# Altium PCB StLink.PcbDoc (part 2 of 3)
Units mm, origin at the board's own origin, x right, y up, seen from the top; angles counter-clockwise.
Board outline 13.1 x 14.6 mm, 6 copper layers (Top Layer, GND, VCC, S3, S4, Bottom Layer), stack 1.623 mm thick; 39 components, 26 nets, 150 pads, 52 vias.
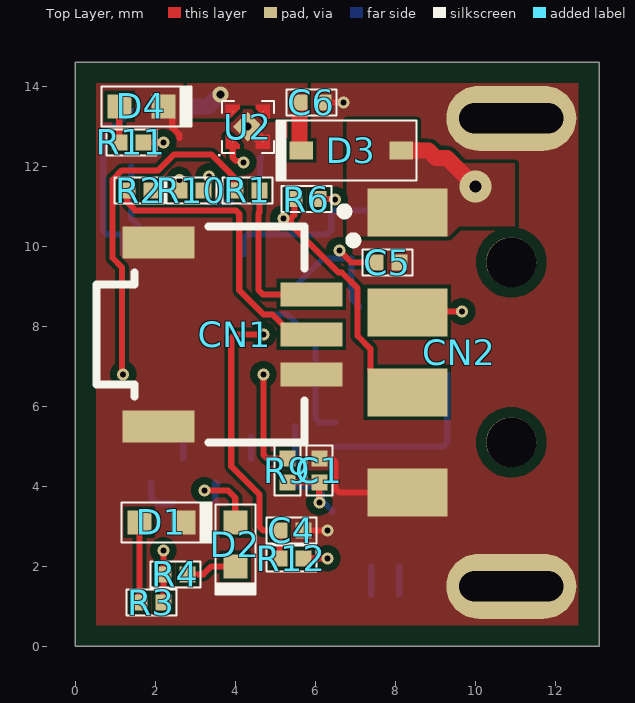
[diagram p0: Top Layer view]

## Part data (continued)
R3 R4 R10 R11: library part RC0201JR-0782RL, "Res Thick Film 0201 82 Ohm 5% 0.05W(1/20W) ±200ppm/C Pad SMD T/R", Case Code (Imperial)=0201, Case Code (Metric)=0603, Manufacturer="Yageo Group", Max Operating Temperature=125°C, Max Power Dissipation=50mW, Min Operating Temperature=-55°C, Supplier Part Number=YAG2365CT-ND, Temperature Coefficient=200ppm/°C, Tolerance=5%, Voltage Rating=25V, Case/Package=0201, Category="Chip SMD Resistors", China RoHS=Non-Compliant, ComponentLink1Description=https://datasheet.octopart.com:443/RC0201JR-0782RL-Yageo-datasheet-175887523.pdf?src-supplier=IHS, ComponentLink1URL=https://datasheet.octopart.com:443/RC0201JR-0782RL-Yageo-datasheet-175887523.pdf?src-supplier=IHS, ComponentLink2Description=https://datasheet.octopart.com:443/RC0201JR-0782RL-Yageo-Group-datasheet-176638170.pdf?src-supplier=Future+Electronics, ComponentLink2URL=https://datasheet.octopart.com:443/RC0201JR-0782RL-Yageo-Group-datasheet-176638170.pdf?src-supplier=Future+Electronics, ComponentLink3Description=https://datasheet.octopart.com:443/RC0201JR-0782RL-Yageo-datasheet-164759695.pdf?src-supplier=Future+Electronics, ComponentLink3URL=https://datasheet.octopart.com:443/RC0201JR-0782RL-Yageo-datasheet-164759695.pdf?src-supplier=Future+Electronics, ComponentLink4Description=https://datasheet.octopart.com:443/RC0201JR-0782RL-Yageo-datasheet-127823281.pdf?src-supplier=Future+Electronics, ComponentLink4URL=https://datasheet.octopart.com:443/RC0201JR-0782RL-Yageo-datasheet-127823281.pdf?src-supplier=Future+Electronics, ComponentLink5Description=https://datasheet.octopart.com:443/RC0201JR-0782RL-Yageo-datasheet-137700087.pdf?src-supplier=Future+Electronics, ComponentLink5URL=https://datasheet.octopart.com:443/RC0201JR-0782RL-Yageo-datasheet-137700087.pdf?src-supplier=Future+Electronics, ComponentLink6Description=https://datasheet.octopart.com:443/RC0201JR-0782RL-Yageo-datasheet-103092701.pdf?src-supplier=Future+Electronics, ComponentLink6URL=https://datasheet.octopart.com:443/RC0201JR-0782RL-Yageo-datasheet-103092701.pdf?src-supplier=Future+Electronics, ComponentLink7Description=https://datasheet.octopart.com:443/RC0201JR-0782RL-Yageo-datasheet-98239111.pdf?src-supplier=Future+Electronics, ComponentLink7URL=https://datasheet.octopart.com:443/RC0201JR-0782RL-Yageo-datasheet-98239111.pdf?src-supplier=Future+Electronics, ComponentLink8Description=https://datasheet.octopart.com:443/RC0201JR-0782RL-Yageo-datasheet-37140709.pdf?src-supplier=Future+Electronics, ComponentLink8URL=https://datasheet.octopart.com:443/RC0201JR-0782RL-Yageo-datasheet-37140709.pdf?src-supplier=Future+Electronics, ComponentLink9Description=https://datasheet.octopart.com:443/RC0201JR-0782RL-Yageo-datasheet-12590898.pdf?src-supplier=Future+Electronics, ComponentLink9URL=https://datasheet.octopart.com:443/RC0201JR-0782RL-Yageo-datasheet-12590898.pdf?src-supplier=Future+Electronics, ComponentLink10Description=https://datasheet.octopart.com:443/RC0201JR-0782RL-Yageo-datasheet-12509713.pdf?src-supplier=Future+Electronics, ComponentLink10URL=https://datasheet.octopart.com:443/RC0201JR-0782RL-Yageo-datasheet-12509713.pdf?src-supplier=Future+Electronics, ComponentLink11Description=https://datasheet.octopart.com:443/RC0201JR-0782RL-Yageo-datasheet-8325180.pdf?src-supplier=Future+Electronics, ComponentLink11URL=https://datasheet.octopart.com:443/RC0201JR-0782RL-Yageo-datasheet-8325180.pdf?src-supplier=Future+Electronics, ComponentLink12Description=https://datasheet.octopart.com:443/RC0201JR-0782RL-Yageo-datasheet-12535854.pdf?src-supplier=Future+Electronics, ComponentLink12URL=https://datasheet.octopart.com:443/RC0201JR-0782RL-Yageo-datasheet-12535854.pdf?src-supplier=Future+Electronics, ComponentLink13Description=https://datasheet.octopart.com/RC0201JR-0782RL-Yageo-datasheet-73766026.pdf, ComponentLink13URL=https://datasheet.octopart.com/RC0201JR-0782RL-Yageo-datasheet-73766026.pdf, ComponentLink14Description=http://sigma.octopart.com:80/conflict_mineral_statement/Yageo-company-3.pdf?src-supplier=Compliance+Statements, ComponentLink14URL=http://sigma.octopart.com:80/conflict_mineral_statement/Yageo-company-3.pdf?src-supplier=Compliance+Statements, ComponentLink15Description=http://sigma.octopart.com:80/rohs_statement/Yageo-company-2.pdf?src-supplier=Compliance+Statements, ComponentLink15URL=http://sigma.octopart.com:80/rohs_statement/Yageo-company-2.pdf?src-supplier=Compliance+Statements, Composition="Thick Film", Contact Plating=Tin, Features="Moisture Resistant", Height=230µm, Lead Free="Lead Free", Length=600µm, Lifecycle Status=Production, Manufacturer Part Number=RC0201JR-0782RL, Mounting Technology="Surface Mount", Number of Terminals=2, Number of Terminations=2, Power Rating=50mW, Pricing="1=0,1, 10=0,028, 25=0,0204, 50=0,0166, 100=0,0135, 250=0,01048, 500=0,00878, 1000=0,00744, 5000=0,00534 (USD)", Radiation Hardening=No, REACH SVHC=Yes, RoHS=Compliant, Stock=21905, Supplier=DigiKey, Supplier 1=DigiKey, Supplier Part Number 1=YAG2365CT-ND, Termination=SMD/SMT, Width=300µm, Working Voltage=25V
R5 R7 R8 R13: library part RC0201FR-071KL, "Res Thick Film 0201 1K Ohm 1% 0.05W(1/20W) ±200ppm/C Pad SMD T/R", Case Code (Imperial)=0201, Case Code (Metric)=0603, Manufacturer="Yageo Group", Max Operating Temperature=125°C, Max Power Dissipation=50mW, Min Operating Temperature=-55°C, Supplier Part Number=311-1KMCT-ND, Temperature Coefficient=200ppm/°C, Tolerance=1%, Voltage Rating=25V, Case/Package=0201, Category="Chip SMD Resistors", China RoHS=Non-Compliant, ComponentLink1Description=https://datasheet.octopart.com:443/RC0201FR-071KL-Yageo-datasheet-175887523.pdf?src-supplier=Newark, ComponentLink1URL=https://datasheet.octopart.com:443/RC0201FR-071KL-Yageo-datasheet-175887523.pdf?src-supplier=Newark, ComponentLink2Description=https://datasheet.octopart.com:443/RC0201FR-071KL-Yageo-datasheet-10025917.pdf?src-supplier=Newark, ComponentLink2URL=https://datasheet.octopart.com:443/RC0201FR-071KL-Yageo-datasheet-10025917.pdf?src-supplier=Newark, ComponentLink3Description=https://datasheet.octopart.com:443/RC0201FR-071KL-Yageo-datasheet-12509713.pdf?src-supplier=_legacy+Avnet, ComponentLink3URL=https://datasheet.octopart.com:443/RC0201FR-071KL-Yageo-datasheet-12509713.pdf?src-supplier=_legacy+Avnet, ComponentLink4Description=https://datasheet.octopart.com:443/RC0201FR-071KL-Yageo-datasheet-13314888.pdf?src-supplier=Upverter, ComponentLink4URL=https://datasheet.octopart.com:443/RC0201FR-071KL-Yageo-datasheet-13314888.pdf?src-supplier=Upverter, ComponentLink5Description=https://datasheet.octopart.com:443/RC0201FR-071KL-Yageo-datasheet-12549147.pdf?src-supplier=Upverter, ComponentLink5URL=https://datasheet.octopart.com:443/RC0201FR-071KL-Yageo-datasheet-12549147.pdf?src-supplier=Upverter, ComponentLink6Description=https://datasheet.octopart.com:443/RC0201FR-071KL-Yageo-datasheet-12509741.pdf?src-supplier=Upverter, ComponentLink6URL=https://datasheet.octopart.com:443/RC0201FR-071KL-Yageo-datasheet-12509741.pdf?src-supplier=Upverter, ComponentLink7Description=https://datasheet.octopart.com:443/RC0201FR-071KL-Yageo-datasheet-62067350.pdf?src-supplier=element14+APAC, ComponentLink7URL=https://datasheet.octopart.com:443/RC0201FR-071KL-Yageo-datasheet-62067350.pdf?src-supplier=element14+APAC, ComponentLink8Description=https://datasheet.octopart.com:443/RC0201FR-071KL-Yageo-datasheet-10911895.pdf?src-supplier=element14+APAC, ComponentLink8URL=https://datasheet.octopart.com:443/RC0201FR-071KL-Yageo-datasheet-10911895.pdf?src-supplier=element14+APAC, ComponentLink9Description=https://datasheet.octopart.com:443/RC0201FR-071KL-Yageo-Group-datasheet-176638170.pdf?src-supplier=Future+Electronics, ComponentLink9URL=https://datasheet.octopart.com:443/RC0201FR-071KL-Yageo-Group-datasheet-176638170.pdf?src-supplier=Future+Electronics, ComponentLink10Description=https://datasheet.octopart.com:443/RC0201FR-071KL-Yageo-datasheet-164759695.pdf?src-supplier=Future+Electronics, ComponentLink10URL=https://datasheet.octopart.com:443/RC0201FR-071KL-Yageo-datasheet-164759695.pdf?src-supplier=Future+Electronics, ComponentLink11Description=https://datasheet.octopart.com:443/RC0201FR-071KL-Yageo-datasheet-127823281.pdf?src-supplier=Future+Electronics, ComponentLink11URL=https://datasheet.octopart.com:443/RC0201FR-071KL-Yageo-datasheet-127823281.pdf?src-supplier=Future+Electronics, ComponentLink12Description=https://datasheet.octopart.com:443/RC0201FR-071KL-Yageo-datasheet-137700087.pdf?src-supplier=Future+Electronics, ComponentLink12URL=https://datasheet.octopart.com:443/RC0201FR-071KL-Yageo-datasheet-137700087.pdf?src-supplier=Future+Electronics, ComponentLink13Description=https://datasheet.octopart.com:443/RC0201FR-071KL-Yageo-datasheet-103092701.pdf?src-supplier=Future+Electronics, ComponentLink13URL=https://datasheet.octopart.com:443/RC0201FR-071KL-Yageo-datasheet-103092701.pdf?src-supplier=Future+Electronics, ComponentLink14Description=https://datasheet.octopart.com:443/RC0201FR-071KL-Yageo-datasheet-98239111.pdf?src-supplier=Future+Electronics, ComponentLink14URL=https://datasheet.octopart.com:443/RC0201FR-071KL-Yageo-datasheet-98239111.pdf?src-supplier=Future+Electronics, ComponentLink15Description=https://datasheet.octopart.com:443/RC0201FR-071KL-Yageo-datasheet-44382975.pdf?src-supplier=Future+Electronics, ComponentLink15URL=https://datasheet.octopart.com:443/RC0201FR-071KL-Yageo-datasheet-44382975.pdf?src-supplier=Future+Electronics, ComponentLink16Description=https://datasheet.octopart.com:443/RC0201FR-071KL-Yageo-datasheet-41589693.pdf?src-supplier=Future+Electronics, ComponentLink16URL=https://datasheet.octopart.com:443/RC0201FR-071KL-Yageo-datasheet-41589693.pdf?src-supplier=Future+Electronics, ComponentLink17Description=https://datasheet.octopart.com:443/RC0201FR-071KL-Yageo-datasheet-37140709.pdf?src-supplier=Future+Electronics, ComponentLink17URL=https://datasheet.octopart.com:443/RC0201FR-071KL-Yageo-datasheet-37140709.pdf?src-supplier=Future+Electronics, ComponentLink18Description=https://datasheet.octopart.com:443/RC0201FR-071KL-Yageo-datasheet-12509768.pdf?src-supplier=Future+Electronics, ComponentLink18URL=https://datasheet.octopart.com:443/RC0201FR-071KL-Yageo-datasheet-12509768.pdf?src-supplier=Future+Electronics, ComponentLink19Description=https://datasheet.octopart.com:443/RC0201FR-071KL-Yageo-datasheet-12590898.pdf?src-supplier=Future+Electronics, ComponentLink19URL=https://datasheet.octopart.com:443/RC0201FR-071KL-Yageo-datasheet-12590898.pdf?src-supplier=Future+Electronics, ComponentLink20Description=https://datasheet.octopart.com:443/RC0201FR-071KL-Yageo-datasheet-12535854.pdf?src-supplier=Future+Electronics, ComponentLink20URL=https://datasheet.octopart.com:443/RC0201FR-071KL-Yageo-datasheet-12535854.pdf?src-supplier=Future+Electronics, ComponentLink21Description=https://datasheet.octopart.com:443/RC0201FR-071KL-Yageo-datasheet-148775077.pdf?src-supplier=TME, ComponentLink21URL=https://datasheet.octopart.com:443/RC0201FR-071KL-Yageo-datasheet-148775077.pdf?src-supplier=TME, ComponentLink22Description=https://datasheet.octopart.com:443/RC0201FR-071KL-Yageo-datasheet-79472498.pdf?src-supplier=Megastar, ComponentLink22URL=https://datasheet.octopart.com:443/RC0201FR-071KL-Yageo-datasheet-79472498.pdf?src-supplier=Megastar, ComponentLink23Description=https://datasheet.octopart.com/RC0201FR-071KL-Yageo-datasheet-73766026.pdf, ComponentLink23URL=https://datasheet.octopart.com/RC0201FR-071KL-Yageo-datasheet-73766026.pdf, ComponentLink24Description=http://sigma.octopart.com:80/conflict_mineral_statement/Yageo-company-3.pdf?src-supplier=Compliance+Statements, ComponentLink24URL=http://sigma.octopart.com:80/conflict_mineral_statement/Yageo-company-3.pdf?src-supplier=Compliance+Statements, ComponentLink25Description=http://sigma.octopart.com:80/rohs_statement/Yageo-company-2.pdf?src-supplier=Compliance+Statements, ComponentLink25URL=http://sigma.octopart.com:80/rohs_statement/Yageo-company-2.pdf?src-supplier=Compliance+Statements, Composition="Thick Film", Contact Plating=Tin, Country of Origin="Mainland China, Taiwan", Depth=300µm, Export Control Classification Number (ECCN) Code=EAR99, Features="Moisture Resistant", Harmonized Tariff Schedule (HTS) Code=8533.21.00.30, Height=230µm, Introduction Date=2008-07-18, Lead Free="Lead Free", Length=600µm, Lifecycle Status=Production, Manufacturer Part Number=RC0201FR-071KL, Military Standard=Not, Mounting Technology="Surface Mount", Number of Terminals=2, Number of Terminations=2, Packaging="Tape & Reel", Power Rating=50mW, Pricing="1=0,1, 10=0,034, 25=0,0252, 50=0,0204, 100=0,0168, 250=0,01316, 500=0,01112, 1000=0,00952, 5000=0,00698 (USD)", Radiation Hardening=No, REACH SVHC=Yes, RoHS=Compliant, Schedule B="8533210045, 8533210045|8533210045|8533210045|8533210045|8533210045|8533210045|8533210045|8533210045|8533210045|8533210045|8533210045|8533210045|8533210045|8533210045|8533210045|8533210045|8533210045|8533210045|8533210045|8533210045|8533210045|8533210045|8533210045|85", Stock=505262, Supplier=DigiKey, Supplier 1=DigiKey, Supplier Part Number 1=311-1KMCT-ND, Termination=SMD/SMT, Voltage Rating (DC)=25V, Width=300µm, Working Voltage=25V
R6: library part RC0201JR-071K5L, "Res Thick Film 0201 1.5K Ohm 5% 0.05W(1/20W) ±200ppm/C Pad SMD T/R", Case Code (Imperial)=0201, Case Code (Metric)=0603, Manufacturer="Yageo Group", Max Operating Temperature=125°C, Max Power Dissipation=50mW, Min Operating Temperature=-55°C, Supplier Part Number=311-1.5KNCT-ND, Temperature Coefficient=200ppm/°C, Tolerance=5%, Voltage Rating=25V, Case/Package=0201, Category="Chip SMD Resistors", China RoHS=Non-Compliant, ComponentLink1Description=https://datasheet.octopart.com:443/RC0201JR-071K5L-Yageo-datasheet-175887523.pdf?src-supplier=IHS, ComponentLink1URL=https://datasheet.octopart.com:443/RC0201JR-071K5L-Yageo-datasheet-175887523.pdf?src-supplier=IHS, ComponentLink2Description=https://datasheet.octopart.com:443/RC0201JR-071K5L-Yageo-Group-datasheet-176638170.pdf?src-supplier=Future+Electronics, ComponentLink2URL=https://datasheet.octopart.com:443/RC0201JR-071K5L-Yageo-Group-datasheet-176638170.pdf?src-supplier=Future+Electronics, ComponentLink3Description=https://datasheet.octopart.com:443/RC0201JR-071K5L-Yageo-datasheet-164759695.pdf?src-supplier=Future+Electronics, ComponentLink3URL=https://datasheet.octopart.com:443/RC0201JR-071K5L-Yageo-datasheet-164759695.pdf?src-supplier=Future+Electronics, ComponentLink4Description=https://datasheet.octopart.com:443/RC0201JR-071K5L-Yageo-datasheet-127823281.pdf?src-supplier=Future+Electronics, ComponentLink4URL=https://datasheet.octopart.com:443/RC0201JR-071K5L-Yageo-datasheet-127823281.pdf?src-supplier=Future+Electronics, ComponentLink5Description=https://datasheet.octopart.com:443/RC0201JR-071K5L-Yageo-datasheet-137700087.pdf?src-supplier=Future+Electronics, ComponentLink5URL=https://datasheet.octopart.com:443/RC0201JR-071K5L-Yageo-datasheet-137700087.pdf?src-supplier=Future+Electronics, ComponentLink6Description=https://datasheet.octopart.com:443/RC0201JR-071K5L-Yageo-datasheet-103092701.pdf?src-supplier=Future+Electronics, ComponentLink6URL=https://datasheet.octopart.com:443/RC0201JR-071K5L-Yageo-datasheet-103092701.pdf?src-supplier=Future+Electronics, ComponentLink7Description=https://datasheet.octopart.com:443/RC0201JR-071K5L-Yageo-datasheet-98239111.pdf?src-supplier=Future+Electronics, ComponentLink7URL=https://datasheet.octopart.com:443/RC0201JR-071K5L-Yageo-datasheet-98239111.pdf?src-supplier=Future+Electronics, ComponentLink8Description=https://datasheet.octopart.com:443/RC0201JR-071K5L-Yageo-datasheet-79472498.pdf?src-supplier=Future+Electronics, ComponentLink8URL=https://datasheet.octopart.com:443/RC0201JR-071K5L-Yageo-datasheet-79472498.pdf?src-supplier=Future+Electronics, ComponentLink9Description=https://datasheet.octopart.com:443/RC0201JR-071K5L-Yageo-datasheet-12535854.pdf?src-supplier=Future+Electronics, ComponentLink9URL=https://datasheet.octopart.com:443/RC0201JR-071K5L-Yageo-datasheet-12535854.pdf?src-supplier=Future+Electronics, ComponentLink10Description=https://datasheet.octopart.com/RC0201JR-071K5L-Yageo-datasheet-73766026.pdf, ComponentLink10URL=https://datasheet.octopart.com/RC0201JR-071K5L-Yageo-datasheet-73766026.pdf, ComponentLink11Description=https://datasheet.octopart.com:443/RC0201JR-071K5L-Yageo-datasheet-10911895.pdf?src-supplier=Farnell, ComponentLink11URL=https://datasheet.octopart.com:443/RC0201JR-071K5L-Yageo-datasheet-10911895.pdf?src-supplier=Farnell, ComponentLink12Description=https://datasheet.octopart.com:443/RC0201JR-071K5L-Yageo-datasheet-8325180.pdf?src-supplier=Farnell, ComponentLink12URL=https://datasheet.octopart.com:443/RC0201JR-071K5L-Yageo-datasheet-8325180.pdf?src-supplier=Farnell, ComponentLink13Description=http://sigma.octopart.com:80/conflict_mineral_statement/Yageo-company-3.pdf?src-supplier=Compliance+Statements, ComponentLink13URL=http://sigma.octopart.com:80/conflict_mineral_statement/Yageo-company-3.pdf?src-supplier=Compliance+Statements, ComponentLink14Description=http://sigma.octopart.com:80/rohs_statement/Yageo-company-2.pdf?src-supplier=Compliance+Statements, ComponentLink14URL=http://sigma.octopart.com:80/rohs_statement/Yageo-company-2.pdf?src-supplier=Compliance+Statements, Composition="Thick Film", Contact Plating=Tin, Country of Origin="Mainland China, Taiwan", Depth=300µm, Export Control Classification Number (ECCN) Code=EAR99, Features="Moisture Resistant", Harmonized Tariff Schedule (HTS) Code=8533.21.00.30, Height=230µm, Introduction Date=2008-07-18, Lead Free="Lead Free", Length=600µm, Lifecycle Status=Production, Manufacturer Part Number=RC0201JR-071K5L, Military Standard=Not, Mounting Technology="Surface Mount", Number of Terminals=2, Number of Terminations=2, Packaging="Tape & Reel", Pins=2, Power Rating=50mW, Pricing="1=0,1, 10=0,028, 25=0,0204, 50=0,0166, 100=0,0135, 250=0,01048, 500=0,00878, 1000=0,00744, 5000=0,00534 (USD)", Radiation Hardening=No, REACH SVHC=Yes, RoHS=Compliant, Schedule B="8533210045, 8533210045|8533210045|8533210045|8533210045|8533210045", Stock=229427, Supplier=DigiKey, Supplier 1=DigiKey, Supplier Part Number 1=311-1.5KNCT-ND, Termination=SMD/SMT, Voltage Rating (DC)=25V, Width=300µm, Working Voltage=25V
R12: library part RC0201FR-07100KL, "50mW Thick Film Resistors 25V ±1% ±200ppm/℃ 100kΩ 0201 Chip Resistor - Surface Mount ROHS", Case Code (Imperial)=0201, Case Code (Metric)=0603, Manufacturer="Yageo Group", Max Operating Temperature=125°C, Max Power Dissipation=50mW, Min Operating Temperature=-55°C, Supplier Part Number=311-100KMDKR-ND, Temperature Coefficient=200ppm/°C, Tolerance=1%, Voltage Rating=25V, Case/Package=0201, Category="Chip SMD Resistors", China RoHS=Non-Compliant, ComponentLink1Description=https://datasheet.octopart.com:443/RC0201FR-07100KL-Yageo-datasheet-175887523.pdf?src-supplier=IHS, ComponentLink1URL=https://datasheet.octopart.com:443/RC0201FR-07100KL-Yageo-datasheet-175887523.pdf?src-supplier=IHS, ComponentLink2Description=https://datasheet.octopart.com:443/RC0201FR-07100KL-Yageo-datasheet-12509713.pdf?src-supplier=element14+APAC, ComponentLink2URL=https://datasheet.octopart.com:443/RC0201FR-07100KL-Yageo-datasheet-12509713.pdf?src-supplier=element14+APAC, ComponentLink3Description=https://datasheet.octopart.com:443/RC0201FR-07100KL-Yageo-datasheet-62067350.pdf?src-supplier=element14+APAC, ComponentLink3URL=https://datasheet.octopart.com:443/RC0201FR-07100KL-Yageo-datasheet-62067350.pdf?src-supplier=element14+APAC, ComponentLink4Description=https://datasheet.octopart.com:443/RC0201FR-07100KL-Yageo-datasheet-10911895.pdf?src-supplier=element14+APAC, ComponentLink4URL=https://datasheet.octopart.com:443/RC0201FR-07100KL-Yageo-datasheet-10911895.pdf?src-supplier=element14+APAC, ComponentLink5Description=https://datasheet.octopart.com:443/RC0201FR-07100KL-Yageo-datasheet-13314888.pdf?src-supplier=Upverter, ComponentLink5URL=https://datasheet.octopart.com:443/RC0201FR-07100KL-Yageo-datasheet-13314888.pdf?src-supplier=Upverter, ComponentLink6Description=https://datasheet.octopart.com:443/RC0201FR-07100KL-Yageo-datasheet-12549147.pdf?src-supplier=Upverter, ComponentLink6URL=https://datasheet.octopart.com:443/RC0201FR-07100KL-Yageo-datasheet-12549147.pdf?src-supplier=Upverter, ComponentLink7Description=https://datasheet.octopart.com:443/RC0201FR-07100KL-Yageo-datasheet-12509741.pdf?src-supplier=Upverter, ComponentLink7URL=https://datasheet.octopart.com:443/RC0201FR-07100KL-Yageo-datasheet-12509741.pdf?src-supplier=Upverter, ComponentLink8Description=https://datasheet.octopart.com:443/RC0201FR-07100KL-Yageo-Group-datasheet-190305687.pdf?src-supplier=Newark, ComponentLink8URL=https://datasheet.octopart.com:443/RC0201FR-07100KL-Yageo-Group-datasheet-190305687.pdf?src-supplier=Newark, ComponentLink9Description=https://datasheet.octopart.com:443/RC0201FR-07100KL-Yageo-datasheet-10025917.pdf?src-supplier=Newark, ComponentLink9URL=https://datasheet.octopart.com:443/RC0201FR-07100KL-Yageo-datasheet-10025917.pdf?src-supplier=Newark, ComponentLink10Description=https://datasheet.octopart.com:443/RC0201FR-07100KL-Yageo-Group-datasheet-176638170.pdf?src-supplier=Future+Electronics, ComponentLink10URL=https://datasheet.octopart.com:443/RC0201FR-07100KL-Yageo-Group-datasheet-176638170.pdf?src-supplier=Future+Electronics, ComponentLink11Description=https://datasheet.octopart.com:443/RC0201FR-07100KL-Yageo-datasheet-164759695.pdf?src-supplier=Future+Electronics, ComponentLink11URL=https://datasheet.octopart.com:443/RC0201FR-07100KL-Yageo-datasheet-164759695.pdf?src-supplier=Future+Electronics, ComponentLink12Description=https://datasheet.octopart.com:443/RC0201FR-07100KL-Yageo-datasheet-127823281.pdf?src-supplier=Future+Electronics, ComponentLink12URL=https://datasheet.octopart.com:443/RC0201FR-07100KL-Yageo-datasheet-127823281.pdf?src-supplier=Future+Electronics, ComponentLink13Description=https://datasheet.octopart.com:443/RC0201FR-07100KL-Yageo-datasheet-137700087.pdf?src-supplier=Future+Electronics, ComponentLink13URL=https://datasheet.octopart.com:443/RC0201FR-07100KL-Yageo-datasheet-137700087.pdf?src-supplier=Future+Electronics, ComponentLink14Description=https://datasheet.octopart.com:443/RC0201FR-07100KL-Yageo-datasheet-103092701.pdf?src-supplier=Future+Electronics, ComponentLink14URL=https://datasheet.octopart.com:443/RC0201FR-07100KL-Yageo-datasheet-103092701.pdf?src-supplier=Future+Electronics, ComponentLink15Description=https://datasheet.octopart.com:443/RC0201FR-07100KL-Yageo-datasheet-98239111.pdf?src-supplier=Future+Electronics, ComponentLink15URL=https://datasheet.octopart.com:443/RC0201FR-07100KL-Yageo-datasheet-98239111.pdf?src-supplier=Future+Electronics, ComponentLink16Description=https://datasheet.octopart.com:443/RC0201FR-07100KL-Yageo-datasheet-44382975.pdf?src-supplier=Future+Electronics, ComponentLink16URL=https://datasheet.octopart.com:443/RC0201FR-07100KL-Yageo-datasheet-44382975.pdf?src-supplier=Future+Electronics, ComponentLink17Description=https://datasheet.octopart.com:443/RC0201FR-07100KL-Yageo-datasheet-41589693.pdf?src-supplier=Future+Electronics, ComponentLink17URL=https://datasheet.octopart.com:443/RC0201FR-07100KL-Yageo-datasheet-41589693.pdf?src-supplier=Future+Electronics, ComponentLink18Description=https://datasheet.octopart.com:443/RC0201FR-07100KL-Yageo-datasheet-37140709.pdf?src-supplier=Future+Electronics, ComponentLink18URL=https://datasheet.octopart.com:443/RC0201FR-07100KL-Yageo-datasheet-37140709.pdf?src-supplier=Future+Electronics, ComponentLink19Description=https://datasheet.octopart.com:443/RC0201FR-07100KL-Yageo-datasheet-12590898.pdf?src-supplier=Future+Electronics, ComponentLink19URL=https://datasheet.octopart.com:443/RC0201FR-07100KL-Yageo-datasheet-12590898.pdf?src-supplier=Future+Electronics, ComponentLink20Description=https://datasheet.octopart.com:443/RC0201FR-07100KL-Yageo-datasheet-5319114.pdf?src-supplier=Future+Electronics, ComponentLink20URL=https://datasheet.octopart.com:443/RC0201FR-07100KL-Yageo-datasheet-5319114.pdf?src-supplier=Future+Electronics, ComponentLink21Description=https://datasheet.octopart.com:443/RC0201FR-07100KL-Yageo-datasheet-12535854.pdf?src-supplier=Future+Electronics, ComponentLink21URL=https://datasheet.octopart.com:443/RC0201FR-07100KL-Yageo-datasheet-12535854.pdf?src-supplier=Future+Electronics, ComponentLink22Description=https://datasheet.octopart.com:443/RC0201FR-07100KL-Yageo-datasheet-148775077.pdf?src-supplier=TME, ComponentLink22URL=https://datasheet.octopart.com:443/RC0201FR-07100KL-Yageo-datasheet-148775077.pdf?src-supplier=TME, ComponentLink23Description=https://datasheet.octopart.com/RC0201FR-07100KL-Yageo-datasheet-73766026.pdf, ComponentLink23URL=https://datasheet.octopart.com/RC0201FR-07100KL-Yageo-datasheet-73766026.pdf, ComponentLink24Description=https://datasheet.octopart.com:443/RC0201FR-07100KL-Yageo-datasheet-8701561.pdf?src-supplier=element14, ComponentLink24URL=https://datasheet.octopart.com:443/RC0201FR-07100KL-Yageo-datasheet-8701561.pdf?src-supplier=element14, ComponentLink25Description=http://sigma.octopart.com:80/conflict_mineral_statement/Yageo-company-3.pdf?src-supplier=Compliance+Statements, ComponentLink25URL=http://sigma.octopart.com:80/conflict_mineral_statement/Yageo-company-3.pdf?src-supplier=Compliance+Statements, ComponentLink26Description=http://sigma.octopart.com:80/rohs_statement/Yageo-company-2.pdf?src-supplier=Compliance+Statements, ComponentLink26URL=http://sigma.octopart.com:80/rohs_statement/Yageo-company-2.pdf?src-supplier=Compliance+Statements, Composition="Thick Film", Contact Plating=Tin, Depth=300µm, Features="Moisture Resistant", Height=230µm, Lead Free="Lead Free", Length=600µm, Lifecycle Status=Production, Manufacturer Part Number=RC0201FR-07100KL, Military Standard=Not, Mounting Technology="Surface Mount", Number of Terminals=2, Number of Terminations=2, Packaging="Tape & Reel", Pins=2, Power Rating=50mW, Pricing="1=0,1, 10=0,034, 25=0,0252, 50=0,0204, 100=0,0168, 250=0,01316, 500=0,01112, 1000=0,00952, 5000=0,00698 (USD)", REACH SVHC=Yes, RoHS=Compliant, Schedule B="8533210045, 8533210045|8533210045|8533210045|8533210045|8533210045|8533210045|8533210045|8533210045|8533210045|8533210045|8533210045|8533210045|8533210045|8533210045, 8533210045|8533210045|8533210045|8533210045|8533210045|8533210045|8533210045|8533210045|8533210045|8533210045|8533210045|8533210045|8533210045|8533210045|8533210045, 8533210045|8533210045|8533210045|8533210045|8533210045|8533210045|8533210045|8533210045|8533210045|8533210045|8533210045|8533210045|8533210045|8533210045|8533210045|8533210045", Stock=1290882, Supplier=DigiKey, Supplier 1=DigiKey, Supplier Part Number 1=311-100KMDKR-ND, Termination=SMD/SMT, Voltage Rating (DC)=25V, Width=300µm, Working Voltage=25V
R14: library part RC0201JR-070RL, "GENERAL PURPOSE CHIP RESISTOR Metal Glaze/thick Film, 0.05W, 0ohm, Surface Mount, 0201", Case Code (Imperial)=0201, Case Code (Metric)=0603, Manufacturer="Yageo Group", Max Operating Temperature=125°C, Max Power Dissipation=50mW, Min Operating Temperature=-55°C, Supplier Part Number=311-0.0NDKR-ND, Temperature Coefficient=200ppm/°C, Tolerance=5%, Voltage Rating=25V, Case/Package=0201, Category="Chip SMD Resistors", China RoHS=Non-Compliant, ComponentLink1Description=https://datasheet.octopart.com:443/RC0201JR-070RL-Yageo-datasheet-182189538.pdf?src-supplier=IHS, ComponentLink1URL=https://datasheet.octopart.com:443/RC0201JR-070RL-Yageo-datasheet-182189538.pdf?src-supplier=IHS, ComponentLink2Description=https://datasheet.octopart.com:443/RC0201JR-070RL-Yageo-datasheet-127823281.pdf?src-supplier=Upverter, ComponentLink2URL=https://datasheet.octopart.com:443/RC0201JR-070RL-Yageo-datasheet-127823281.pdf?src-supplier=Upverter, ComponentLink3Description=https://datasheet.octopart.com:443/RC0201JR-070RL-Yageo-Group-datasheet-190305687.pdf?src-supplier=Newark, ComponentLink3URL=https://datasheet.octopart.com:443/RC0201JR-070RL-Yageo-Group-datasheet-190305687.pdf?src-supplier=Newark, ComponentLink4Description=https://datasheet.octopart.com:443/RC0201JR-070RL-Yageo-datasheet-8325180.pdf?src-supplier=Newark, ComponentLink4URL=https://datasheet.octopart.com:443/RC0201JR-070RL-Yageo-datasheet-8325180.pdf?src-supplier=Newark, ComponentLink5Description=https://datasheet.octopart.com:443/RC0201JR-070RL-Yageo-datasheet-12509713.pdf?src-supplier=element14+APAC, ComponentLink5URL=https://datasheet.octopart.com:443/RC0201JR-070RL-Yageo-datasheet-12509713.pdf?src-supplier=element14+APAC, ComponentLink6Description=https://datasheet.octopart.com:443/RC0201JR-070RL-Yageo-datasheet-62067350.pdf?src-supplier=element14+APAC, ComponentLink6URL=https://datasheet.octopart.com:443/RC0201JR-070RL-Yageo-datasheet-62067350.pdf?src-supplier=element14+APAC, ComponentLink7Description=https://datasheet.octopart.com:443/RC0201JR-070RL-Yageo-datasheet-10911895.pdf?src-supplier=element14+APAC, ComponentLink7URL=https://datasheet.octopart.com:443/RC0201JR-070RL-Yageo-datasheet-10911895.pdf?src-supplier=element14+APAC, ComponentLink8Description=https://datasheet.octopart.com:443/RC0201JR-070RL-Yageo-Group-datasheet-176638170.pdf?src-supplier=Future+Electronics, ComponentLink8URL=https://datasheet.octopart.com:443/RC0201JR-070RL-Yageo-Group-datasheet-176638170.pdf?src-supplier=Future+Electronics, ComponentLink9Description=https://datasheet.octopart.com:443/RC0201JR-070RL-Yageo-datasheet-164759695.pdf?src-supplier=Future+Electronics, ComponentLink9URL=https://datasheet.octopart.com:443/RC0201JR-070RL-Yageo-datasheet-164759695.pdf?src-supplier=Future+Electronics, ComponentLink10Description=https://datasheet.octopart.com:443/RC0201JR-070RL-Yageo-datasheet-137700087.pdf?src-supplier=Future+Electronics, ComponentLink10URL=https://datasheet.octopart.com:443/RC0201JR-070RL-Yageo-datasheet-137700087.pdf?src-supplier=Future+Electronics, ComponentLink11Description=https://datasheet.octopart.com:443/RC0201JR-070RL-Yageo-datasheet-103092701.pdf?src-supplier=Future+Electronics, ComponentLink11URL=https://datasheet.octopart.com:443/RC0201JR-070RL-Yageo-datasheet-103092701.pdf?src-supplier=Future+Electronics, ComponentLink12Description=https://datasheet.octopart.com:443/RC0201JR-070RL-Yageo-datasheet-98239111.pdf?src-supplier=Future+Electronics, ComponentLink12URL=https://datasheet.octopart.com:443/RC0201JR-070RL-Yageo-datasheet-98239111.pdf?src-supplier=Future+Electronics, ComponentLink13Description=https://datasheet.octopart.com:443/RC0201JR-070RL-Yageo-datasheet-44382975.pdf?src-supplier=Future+Electronics, ComponentLink13URL=https://datasheet.octopart.com:443/RC0201JR-070RL-Yageo-datasheet-44382975.pdf?src-supplier=Future+Electronics, ComponentLink14Description=https://datasheet.octopart.com:443/RC0201JR-070RL-Yageo-datasheet-41589693.pdf?src-supplier=Future+Electronics, ComponentLink14URL=https://datasheet.octopart.com:443/RC0201JR-070RL-Yageo-datasheet-41589693.pdf?src-supplier=Future+Electronics, ComponentLink15Description=https://datasheet.octopart.com:443/RC0201JR-070RL-Yageo-datasheet-37140709.pdf?src-supplier=Future+Electronics, ComponentLink15URL=https://datasheet.octopart.com:443/RC0201JR-070RL-Yageo-datasheet-37140709.pdf?src-supplier=Future+Electronics, ComponentLink16Description=https://datasheet.octopart.com:443/RC0201JR-070RL-Yageo-datasheet-12590898.pdf?src-supplier=Future+Electronics, ComponentLink16URL=https://datasheet.octopart.com:443/RC0201JR-070RL-Yageo-datasheet-12590898.pdf?src-supplier=Future+Electronics, ComponentLink17Description=https://datasheet.octopart.com:443/RC0201JR-070RL-Yageo-datasheet-5319114.pdf?src-supplier=Future+Electronics, ComponentLink17URL=https://datasheet.octopart.com:443/RC0201JR-070RL-Yageo-datasheet-5319114.pdf?src-supplier=Future+Electronics, ComponentLink18Description=https://datasheet.octopart.com:443/RC0201JR-070RL-Yageo-datasheet-12535854.pdf?src-supplier=Future+Electronics, ComponentLink18URL=https://datasheet.octopart.com:443/RC0201JR-070RL-Yageo-datasheet-12535854.pdf?src-supplier=Future+Electronics, ComponentLink19Description=https://datasheet.octopart.com:443/RC0201JR-070RL-Yageo-datasheet-148775077.pdf?src-supplier=TME, ComponentLink19URL=https://datasheet.octopart.com:443/RC0201JR-070RL-Yageo-datasheet-148775077.pdf?src-supplier=TME, ComponentLink20Description=https://datasheet.octopart.com/RC0201JR-070RL-Yageo-datasheet-73766026.pdf, ComponentLink20URL=https://datasheet.octopart.com/RC0201JR-070RL-Yageo-datasheet-73766026.pdf, ComponentLink21Description=https://datasheet.octopart.com:443/RC0201JR-070RL-Yageo-datasheet-8701561.pdf?src-supplier=element14, ComponentLink21URL=https://datasheet.octopart.com:443/RC0201JR-070RL-Yageo-datasheet-8701561.pdf?src-supplier=element14, ComponentLink22Description=http://sigma.octopart.com:80/conflict_mineral_statement/Yageo-company-3.pdf?src-supplier=Compliance+Statements, ComponentLink22URL=http://sigma.octopart.com:80/conflict_mineral_statement/Yageo-company-3.pdf?src-supplier=Compliance+Statements, ComponentLink23Description=http://sigma.octopart.com:80/rohs_statement/Yageo-company-2.pdf?src-supplier=Compliance+Statements, ComponentLink23URL=http://sigma.octopart.com:80/rohs_statement/Yageo-company-2.pdf?src-supplier=Compliance+Statements, Composition="Thick Film", Contact Plating=Tin, Depth=300µm, Features="Moisture Resistant", Height=230µm, Lead Free="Lead Free", Length=600µm, Lifecycle Status=Production, Manufacturer Part Number=RC0201JR-070RL, Military Standard=Not, Mounting Technology="Surface Mount", Number of Terminals=2, Number of Terminations=2, Packaging="Tape & Reel", Pins=2, Power Rating=50mW, Pricing="1=0,1, 10=0,019, 25=0,0156, 50=0,0138, 100=0,012, 250=0,01008, 500=0,0089, 1000=0,0079, 5000=0,00609 (USD)", Radiation Hardening=No, REACH SVHC=Yes, RoHS=Compliant, Stock=2082175, Supplier=DigiKey, Supplier 1=DigiKey, Supplier Part Number 1=311-0.0NDKR-ND, Termination=SMD/SMT, Voltage Rating (DC)=25V, Weight=170.097139µg, Width=300µm
U1: "MCU 32-bit STM32F ARM Cortex M3 RISC 64KB Flash 2.5V/3.3V 64-Pin TFBGA Tray", Case/Package=FBGA, Clock Frequency=16MHz, Frequency=72MHz, Manufacturer=STMicroelectronics, Max Operating Temperature=85°C, Max Power Dissipation=308mW, Max Supply Current=50mA, Max Supply Voltage=3.6V, Min Operating Temperature=-40°C, Min Supply Voltage=2V, Nominal Supply Current=1.7µA, Operating Supply Voltage=3.3V, Supplier Part Number=497-11523-ND, Temperature Grade=Industrial, ADC Channels (Resolution)="16-Ch 12-Bit", Category=Microcontrollers, China RoHS=Compliant, ComponentLink1Description=https://datasheet.octopart.com:443/STM32F103R8H6-STMicroelectronics-datasheet-177520228.pdf?src-supplier=IHS, ComponentLink1URL=https://datasheet.octopart.com:443/STM32F103R8H6-STMicroelectronics-datasheet-177520228.pdf?src-supplier=IHS, ComponentLink2Description=https://datasheet.octopart.com:443/STM32F103R8H6-STMicroelectronics-datasheet-14363502.pdf?src-supplier=Upverter, ComponentLink2URL=https://datasheet.octopart.com:443/STM32F103R8H6-STMicroelectronics-datasheet-14363502.pdf?src-supplier=Upverter, ComponentLink3Description=https://datasheet.octopart.com:443/STM32F103R8H6-STMicroelectronics-datasheet-48026265.pdf?src-supplier=Farnell, ComponentLink3URL=https://datasheet.octopart.com:443/STM32F103R8H6-STMicroelectronics-datasheet-48026265.pdf?src-supplier=Farnell, ComponentLink4Description=https://datasheet.octopart.com:443/STM32F103R8H6-STMicroelectronics-datasheet-21407612.pdf?src-supplier=Farnell, ComponentLink4URL=https://datasheet.octopart.com:443/STM32F103R8H6-STMicroelectronics-datasheet-21407612.pdf?src-supplier=Farnell, ComponentLink5Description=https://datasheet.octopart.com:443/STM32F103R8H6-STMicroelectronics-datasheet-16809485.pdf?src-supplier=Farnell, ComponentLink5URL=https://datasheet.octopart.com:443/STM32F103R8H6-STMicroelectronics-datasheet-16809485.pdf?src-supplier=Farnell, ComponentLink6Description=https://datasheet.octopart.com:443/STM32F103R8H6-STMicroelectronics-datasheet-10330614.pdf?src-supplier=Newark, ComponentLink6URL=https://datasheet.octopart.com:443/STM32F103R8H6-STMicroelectronics-datasheet-10330614.pdf?src-supplier=Newark, ComponentLink7Description=https://datasheet.octopart.com:443/STM32F103R8H6-STMicroelectronics-datasheet-500013.pdf?src-supplier=Factory+Futures, ComponentLink7URL=https://datasheet.octopart.com:443/STM32F103R8H6-STMicroelectronics-datasheet-500013.pdf?src-supplier=Factory+Futures, ComponentLink8Description=https://datasheet.octopart.com:443/STM32F103R8H6-STMicroelectronics-datasheet-6396519.pdf?src-supplier=Augswan, ComponentLink8URL=https://datasheet.octopart.com:443/STM32F103R8H6-STMicroelectronics-datasheet-6396519.pdf?src-supplier=Augswan, ComponentLink9Description=https://datasheet.octopart.com:443/STM32F103R8H6-STMicroelectronics-datasheet-14106722.pdf?src-supplier=iiiC, ComponentLink9URL=https://datasheet.octopart.com:443/STM32F103R8H6-STMicroelectronics-datasheet-14106722.pdf?src-supplier=iiiC, ComponentLink10Description=https://datasheet.octopart.com:443/STM32F103R8H6-STMicroelectronics-datasheet-8700640.pdf?src-supplier=Arrow+Electronics, ComponentLink10URL=https://datasheet.octopart.com:443/STM32F103R8H6-STMicroelectronics-datasheet-8700640.pdf?src-supplier=Arrow+Electronics, Core Architecture=ARM, Country of Origin=Malaysia, Data Bus Width=32b, EEPROM Memory Size=0B, Export Control Classification Number (ECCN) Code=3A991.A.2, Flash Memory Size=64kB, Harmonized Tariff Schedule (HTS) Code=8542.31.00.30, Height=785µm, Interface="CAN, USB", Introduction Date=2007-06-07, Lead Free="Lead Free", Length=5mm, Lifecycle Status=Production, Manufacturer Part Number=STM32F103R8H6, Memory Format=FLASH, Memory Size=64kB, Number of A/D Converters=2, Number of ADC Channels=16, Number of I2C Channels=2, Number of I/Os=51, Number of Programmable I/O=51, Number of SPI Channels=2, Number of Terminals=64, Number of Timers/Counters=4, Number of USART Channels=3, Oscillator Type=Internal, Peripherals=POR, Pins=64, Pricing="3840=4,08947 (USD)", Radiation Hardening=No, RAM Size=20kB, REACH SVHC=Yes, RoHS=Compliant, Supplier=DigiKey, Supplier 1=DigiKey, Supplier Part Number 1=497-11523-ND, Terminal Pitch=500µm, Watchdog Timer=Yes, Width=5mm
U2: library part AP7343D-33FS4-7B, "Ldo, Fixed, 3.3V, 0.3A, -40 To 85Deg C Rohs Compliant: Yes", Dropout Voltage=220mV, LCSC=C260892, Manufacturer="Diodes Inc.", Max Junction Temperature (Tj)=125°C, Max Operating Temperature=85°C, Max Supply Voltage=5.25V, Min Input Voltage=4.3V, Min Operating Temperature=-40°C, Output Current=300mA, Output Voltage=3.3V, Supplier Part Number=AP7343D-33FS4-7BDICT-ND, Voltage Tolerance=1%, Category="LDO Voltage Regulators", China RoHS=Compliant, ComponentLink1Description=https://datasheet.octopart.com:443/AP7343D-33FS4-7B-Diodes-Inc.-datasheet-160640090.pdf?src-supplier=IHS, ComponentLink1URL=https://datasheet.octopart.com:443/AP7343D-33FS4-7B-Diodes-Inc.-datasheet-160640090.pdf?src-supplier=IHS, ComponentLink2Description=https://datasheet.octopart.com:443/AP7343D-33FS4-7B-Diodes-Inc.-datasheet-76801213.pdf?src-supplier=SHENGYU+ELECTRONICS, ComponentLink2URL=https://datasheet.octopart.com:443/AP7343D-33FS4-7B-Diodes-Inc.-datasheet-76801213.pdf?src-supplier=SHENGYU+ELECTRONICS, Country of Origin="Mainland China", Export Control Classification Number (ECCN) Code=EAR99, Harmonized Tariff Schedule (HTS) Code=8542.39.00.60, Height - Seated (Max)=400µm, Introduction Date=2015-12-08, Length=1mm, Lifecycle Status=Production, Manufacturer Part Number=AP7343D-33FS4-7B, Mounting Technology="Surface Mount", Number of Circuits=1, Number of Outputs=1, Number of Regulators=1, Number of Terminals=4, Pricing="1=0,11, 10=0,076, 25=0,0664, 100=0,0557, 250=0,05072, 500=0,04772, 1000=0,04524, 2500=0,04261, 5000=0,04103, 10000=0,03973, 20000=0,03865, 30000=0,03812, 50000=0,03752, 70000=0,03717, 100000=0,03684, 250000=0,03612 (USD)", REACH SVHC=Yes, RoHS=Compliant, Stock=9621, Supplier=DigiKey, Supplier 1=DigiKey, Supplier Location 1=US, Supplier Packaging 1="Cut Tape", Supplier Part Number 1=AP7343D-33FS4-7BDICT-ND, Supplier Unit Price 1=$0.11, Terminal Pitch=650µm, Width=1mm
X1: library part ECS-80-12-33-JGN-TR, "Crystal 8MHz ±20ppm (Tol) ±30ppm (Stability) 12pF FUND 400Ohm 4-Pin Mini-CSMD T/R", Frequency Stability=30ppm, Frequency Tolerance=0.002%, Load Capacitance=12pF, Manufacturer="ECS International", Max Operating Temperature=85°C, Min Operating Temperature=-40°C, Supplier Part Number=50-ECS-80-12-33-JGN-CT-ND, Category=Crystals, ComponentLink1Description=https://datasheet.octopart.com:443/ECS-80-12-33-JGN-TR-ECS-International-datasheet-182217405.pdf?src-supplier=IHS, ComponentLink1URL=https://datasheet.octopart.com:443/ECS-80-12-33-JGN-TR-ECS-International-datasheet-182217405.pdf?src-supplier=IHS, ComponentLink2Description=https://datasheet.octopart.com:443/ECS-80-12-33-JGN-TR-ECS-International-datasheet-17018741.pdf?src-supplier=Master+Electronics, ComponentLink2URL=https://datasheet.octopart.com:443/ECS-80-12-33-JGN-TR-ECS-International-datasheet-17018741.pdf?src-supplier=Master+Electronics, ComponentLink3Description=https://datasheet.octopart.com:443/ECS-80-12-33-JGN-TR-ECS-International-datasheet-179230830.pdf?src-supplier=Master+Electronics, ComponentLink3URL=https://datasheet.octopart.com:443/ECS-80-12-33-JGN-TR-ECS-International-datasheet-179230830.pdf?src-supplier=Master+Electronics, ComponentLink4Description=https://datasheet.octopart.com:443/ECS-80-12-33-JGN-TR-ECS-International-datasheet-140089731.pdf?src-supplier=Future+Electronics, ComponentLink4URL=https://datasheet.octopart.com:443/ECS-80-12-33-JGN-TR-ECS-International-datasheet-140089731.pdf?src-supplier=Future+Electronics, Country of Origin="South Korea, Taiwan", ESR=400Ω, Frequency=8MHz, Harmonized Tariff Schedule (HTS) Code=8541.60.00.50, Introduction Date=2018-05-11, Lifecycle Status=Production, Manufacturer Part Number=ECS-80-12-33-JGN-TR, Mounting Technology="Surface Mount", Pricing="1=0,58, 10=0,508, 25=0,4808, 50=0,461, 100=0,4419, 250=0,41784, 500=0,40056 (USD)", REACH SVHC=Yes, RoHS=Compliant, Schedule B="8541600025, 8541600025|8541600025, 8541600025|8541600025|8541600025, 8541600025|8541600025|8541600025|8541600025", Stock=8185, Supplier=DigiKey, Supplier 1=DigiKey, Supplier Part Number 1=50-ECS-80-12-33-JGN-CT-ND

## Via types
v1: diameter 0.3, hole 0.15, S4 to Bottom Layer, tented both sides, 11 vias
v2: diameter 0.3, hole 0.15, VCC to Bottom Layer, tented both sides, 8 vias
v3: diameter 0.3, hole 0.15, S3 to Bottom Layer, tented both sides, 7 vias
v4: diameter 0.3, hole 0.15, Top Layer to VCC, tented both sides, 7 vias
v5: diameter 0.3, hole 0.15, GND to Bottom Layer, tented both sides, 6 vias
v6: diameter 0.3, hole 0.15, Top Layer to Bottom Layer, tented both sides, 5 vias
v7: diameter 0.3, hole 0.15, Top Layer to S3, tented both sides, 4 vias
v8: diameter 0.3, hole 0.15, Top Layer to S4, tented both sides, 1 vias
v9: diameter 0.8, hole 0.3, Top Layer to Bottom Layer, tented both sides, 1 vias
v10: diameter 0.5, hole 0.2, Top Layer to Bottom Layer, tented both sides, 1 vias
v11: diameter 0.4, hole 0.2, Top Layer to Bottom Layer, tented both sides, 1 vias

## Nets (pads, with @x,y where several pads share a name; then routed paths per layer and width w, separated by ;. In a path a pad name is that pad's centre, name@x,y a point inside that pad or via, vN(x,y) a via of type N, cw(c..) or ccw(c..) an arc to the next point about the centre after c; other vN are vias at no path point)
3.3V: C1.1 C5.1 C7.1 C8.1 C9.1 C10.1 C11.1 C12.1 D2.2 R6.2 R8.2 R9.2 R11.2 R12.2 U1.B2 U1.D2 U1.E4 U1.E5 U1.E6 U1.H1 U2.1 | length 34.9
  Top Layer w0.152: R11.2 v4(2.2,12.6) ; v4(3.229,3.9) 3.811,3.9 4,3.711 D2.2 ; U2.1 3.937,12.217 4.027,12.128 4.172,12.128 v4(4.2,12.1) ; R9.2 C1.1 v4(6.1,3.6) ; R12.2 v4(6.3,2.2) ; R6.2 v4@6.478,11.178 ; v4(6.6,9.9) 6.9,9.6 C5.1
  S4 w0.152: v1(2.198,7.798) 2.198,7.397 2.6,6.995 2.6,6.969 2.603,6.965 2.603,6.63 2.6,6.626 2.6,6 2,5.4 2,4.021 v2(2.446,3.575) ; v2(2.577,5.25) 2.593,5.25 2.852,5.51 2.96,5.51 3.1,5.65 3.1,6.825 2.794,7.13 2.794,7.466 2.832,7.503 2.832,7.629 2.699,7.762 v1(2.699,7.798) ; v1(3.199,7.798) 3.206,7.792 3.424,7.792 3.513,7.703 3.515,7.703 3.604,7.614 3.604,4.404 3.5,4.3 v2(3.5,3.6) ; v1(4.2,9.305) 6.011,9.305 6.1,9.394 6.1,11.7 5.564,12.236 v2(4.636,12.236)
  S3 w0.152: v2(3.3,11.1) 3.3,10.189 3.389,10.1 3.9,10.1 4.8,9.2 4.8,8.5 4.599,8.299 v3(4.2,8.299) ; v2(4.4,5.229) 4.4,5.997 v3(4.7,6.297)
  Bottom Layer w0.152: C9.1 1.9,3.717 1.989,3.628 1.992,3.628 2.045,3.575 v2(2.446,3.575) ; v2(2.577,5.25) 2.577,5.216 2.7,5.093 C7.1 ; v2(3.3,11.1) C10.1 ; v2(3.5,3.6) C8.1 C8.1@3.55,4.05 ; C12.1 v2(4.4,5.229) ; C11.1 4.618,11.718 4.618,12.218 v2(4.636,12.236) ; v2@4.6,12.2 v2@4.628,12.172 ; R8.2 6,4 6.172,3.828 6.172,3.644 6.424,3.392 v2(6.424,3.363)
  other v4: 6.492,11.164
5V: C6.1 D3.1 TP4.1 U2.3 U2.4 | length 2.2
  Top Layer w0.4: C6.1 5.6,12.592 ccw(c6,12.594) 5.607,12.519 5.625,12.425 D3.1
  Bottom Layer w0.4: TP4.1 2.9,13.5 3.325,13.5 v11(3.625,13.8)
"AIN 1": R8.1 U1.G2 | length 3.3
  S4 w0.152: v1(4.2,6.798) 4.2,5.788 4.289,5.699 5.302,5.699 v1(5.5,5.502)
  Bottom Layer w0.152: R8.1 v1@5.5,5.5
GND: C1.2 C2.1 C3.1 C4.2 C5.2 C6.2 C7.2 C8.2 C9.2 C10.2 C11.2 C12.2 CN1.3 CN1.S1 CN1.S2 CN2.4 CN2.5 CN2.6 D1.1 D4.1 R5.1 R7.1 R13.1 TP3.1 U1.C2 U1.D4 U1.D5 U1.D6 U1.F1 U1.G6 U2.2 U2.5 X1.2 X1.4 | length 5
  Top Layer w0.152: D4.1 2.424,13.276 2.424,12.972 2.605,12.791 2.605,12.705 ; C4.2 v6(6.3,2.9) ; C1.2 6.411,4.7 6.5,4.611 6.5,3.939 6.589,3.85 CN2.4@7.8,3.85 ; C6.2 v6(6.7,13.6)
  Top Layer w0.3: v10(4.3,13) 4.381,12.919 4.675,12.625
  other v2: 2.6,12.136
  other v5: 2.198,6.798 4.7,7.298 2.198,8.299 2.699,8.299 3.199,8.299 4.2,8.799
"LED STLINK": R3.1 R4.1 U1.C7 | length 10
  Top Layer w0.152: R3.1 R4.1 v7(2.2,2.4)
  S3 w0.152: v3(1.698,8.799) 3.272,8.799 3.604,8.467 3.604,7.13 2.982,6.508 2.982,3.182 v7(2.2,2.4)
NetC2_2: C2.2 R14.1 X1.1 | length 4.5
  Bottom Layer w0.152: R14.1 C2.2 9.211,5 9.3,5.089 X1.1
NetC4_1: C4.1 R12.1 U1.E1 | length 7.1
  Top Layer w0.152: v6(4.7,7.8) 4,7.8 3.9,7.7 3.9,4.5 4.6,3.8 4.6,2.989 4.689,2.9 C4.1 R12.1
NetCN1_1: CN1.1 R1.1 | length 3.9
  Top Layer w0.152: R1.1 4.6,10.848 4.577,10.825 4.577,8.912 4.689,8.8 CN1.1
NetCN1_2: CN1.2 R2.1 | length 7.5
  Top Layer w0.152: R2.1@1.3,11.5 R2.1 1.3,11.1 1.5,10.9 4.011,10.9 4.1,10.811 4.1,8.9 4.7,8.3 4.925,8.3 5.425,7.8 CN1.2
NetD1_2: D1.2 R3.2 | length 2
  Top Layer w0.152: R3.2 D1.2
NetD2_1: D2.1 R4.2 | length 1.3
  Top Layer w0.152: R4.2 3.2,1.8 3.4,2 D2.1
NetD4_2: D4.2 R11.1 | length 0.9
  Top Layer w0.152: R11.1 D4.2
NetR5_2: R5.2 U1.A2 | length 4.3
  Bottom Layer w0.152: U1.A2 4.2,10.2 4.3,10.3 6.3,10.3 6.4,10.4 6.4,10.8 6.5,10.9 R5.2
NetR7_2: R7.2 U1.B4 | length 19
  S4 w0.152: v1(3.199,9.3) 2.794,9.705 1.03,9.705 0.3,8.975 0.3,3.387 2.887,0.8 8,0.8 8.1,0.9 v1(8.1,1.3)
  Bottom Layer w0.152: v1(8.1,1.3) R7.2
NetR9_1: R9.1 U1.G1 | length 2.6
  Top Layer w0.152: v6(4.7,6.8) 4.7,4.789 4.789,4.7 R9.1
NetR13_2: R13.2 U1.D7 | length 12
  S4 w0.152: v1(1.698,8.299) 1.698,3.751 4.149,1.3 v1(7.4,1.3)
  Bottom Layer w0.152: v1(7.4,1.3) R13.2
"OSC IN": C3.2 U1.C1 X1.3 | length 3.9
  Bottom Layer w0.152: U1.C1 5.299,8.799 6.2,9.7 C3.2 6.9,8.7 X1.3
"OSC OUT": R14.2 U1.D1 | length 4
  Bottom Layer w0.152: U1.D1 5.301,8.299 6,7.6 6,5.7 6.1,5.6 R14.2
"STM JTCK": TP1.1 U1.A7 | length 2.3
  Bottom Layer w0.152: TP1.1 1.4,10.7 1.7,10.4 1.7,9.802 U1.A7
"STM JTMS": TP2.1 U1.A8 | length 4.4
  Bottom Layer w0.152: U1.A8 1.198,10.211 1.109,10.3 0.789,10.3 0.7,10.389 0.7,12.903 0.789,12.993 0.993,12.993 TP2.1
"T JTCK": R1.2 U1.F4 U1.G8 | length 11.1
  Top Layer w0.152: v6(1.198,6.798) 1.169,6.826 1.169,6.931 1.167,6.933 1.167,9.475 0.935,9.707 0.935,11.668 1.167,11.9 2.073,11.9 2.473,12.3 3.4,12.3 3.964,11.736 3.964,11.436 R1.2
  S3 w0.152: v6(1.198,6.798) 1.626,6.798 2.126,7.298 v3(3.199,7.298)
"T JTMS": R2.2 R10.1 U1.F8 | length 21.6
  Top Layer w0.152: R2.2 R10.1 v7(2.6,11.657)
  S3 w0.152: v3(1.198,7.298) 1.158,7.298 1.065,7.205 0.882,7.205 0.793,7.116 0.793,2.894 1.932,1.754 2.868,1.754 5.4,4.287 5.4,9.5 4.384,10.516 4.384,11.284 3.415,12.252 3.276,12.252 3.005,11.981 3.005,11.968 2.768,11.731 2.714,11.731 2.64,11.657 v7(2.6,11.657)
"T SWDIO IN": R10.2 U1.H8 | length 17.2
  Top Layer w0.152: R10.2 3.317,11.517 3.317,11.721 v7(3.346,11.749)
  S3 w0.152: v3(1.198,6.3) 1.629,5.869 1.629,2.398 2.032,1.995 2.768,1.995 5.105,4.333 5.105,9.235 3.9,10.441 3.9,11.195 v7(3.346,11.749)
U5V: CN2.1 D3.2 | length 2.2
  Top Layer w0.4: D3.2 8.83,12.4 9.016,12.213 9.287,12.213 v9(10,11.5)
"USB DM": CN2.2 U1.C8 | length 15.5
  Top Layer w0.152: CN2.2@8.1,8.35 8.121,8.371 v7(9.665,8.371)
  S3 w0.152: v3(1.2,8.8) 1.2,12.452 1.289,12.541 3.759,12.541 5.095,11.205 5.268,11.205 8.102,8.371 v7(9.665,8.371)
"USB DP": CN2.3 R6.1 U1.B8 | length 12.4
  Top Layer w0.152: v8(5.2,10.7) 5.389,10.7 ; R6.1 5.478,10.789 5.389,10.7 ; CN2.3 7.9,6.35 7.376,6.874 7.376,7.441 7.06,7.757 7.06,8.949 6.668,9.34 6.587,9.34 5.389,10.538 5.389,10.7
  S4 w0.152: v1(1.198,9.3) 2.066,9.3 2.471,8.895 3.411,8.895 3.605,9.089 3.605,10.611 3.695,10.7 v8(5.2,10.7)